# EAGLE board pcb (EAGLE 9.2.2)
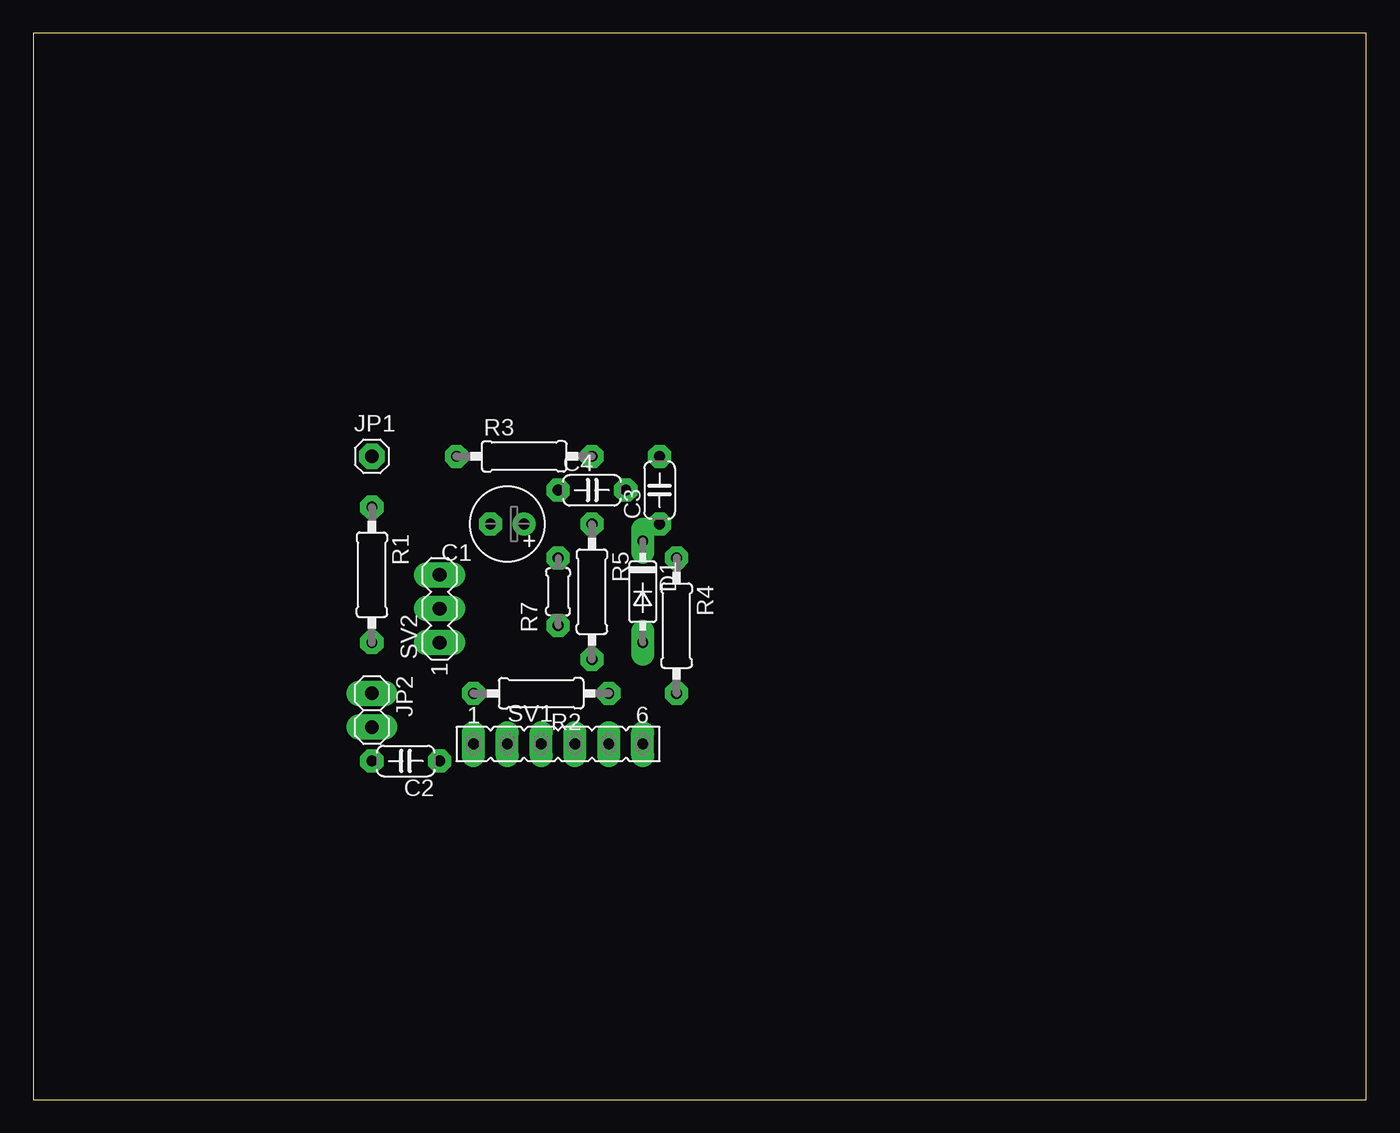
[diagram p0: board, top side]
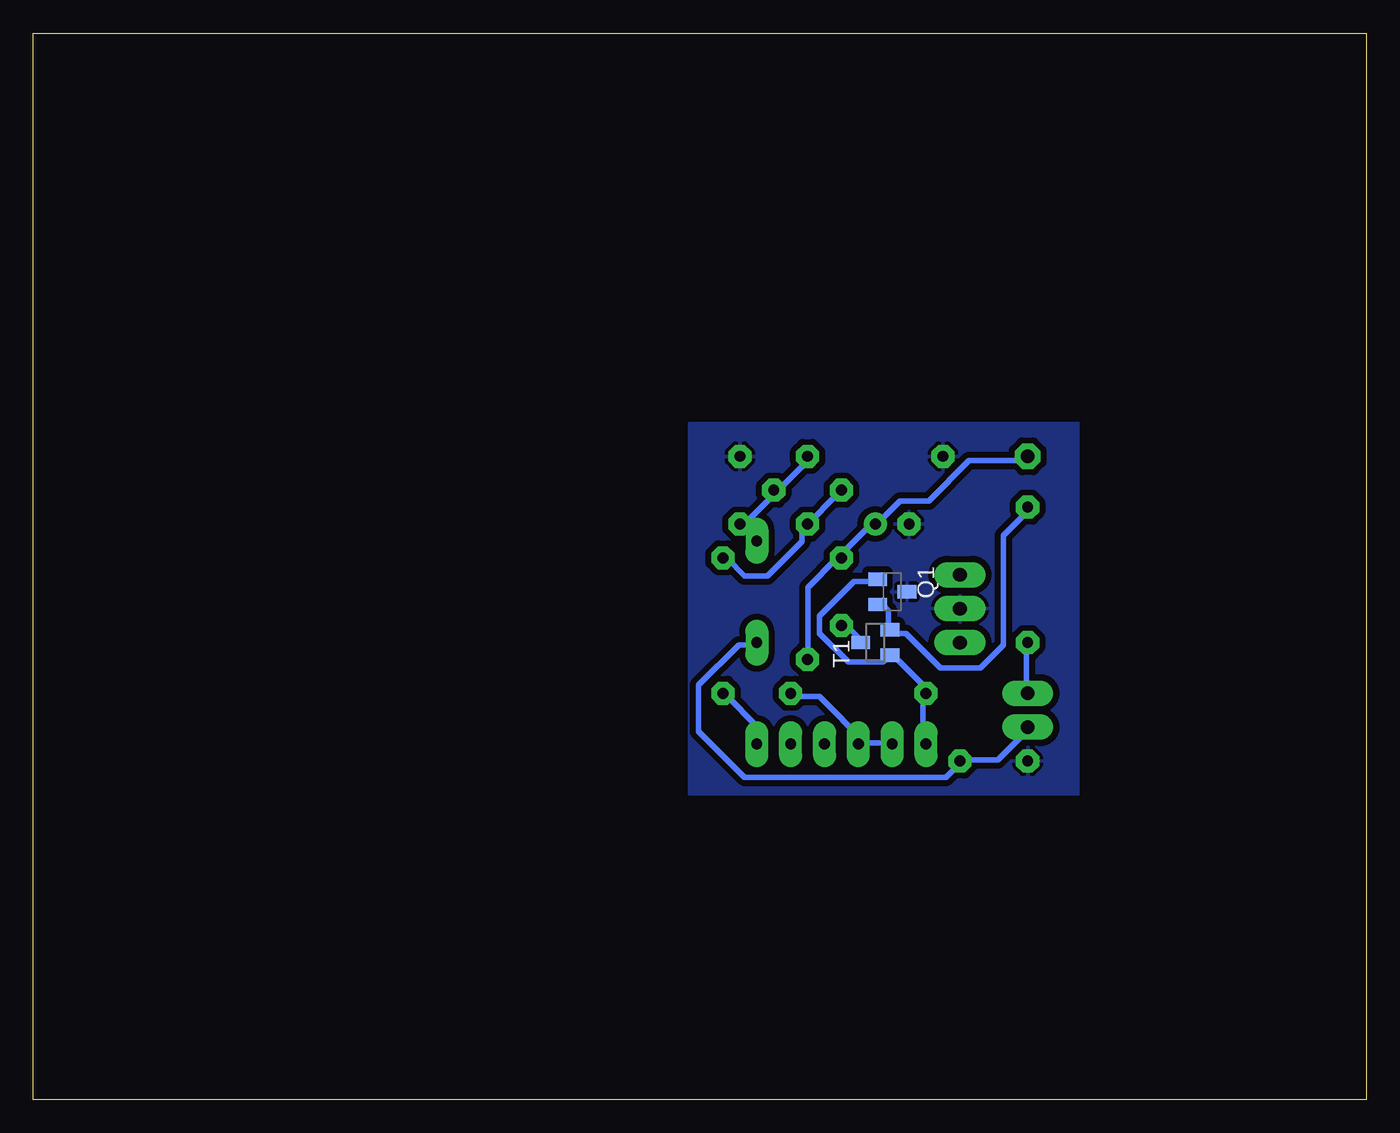
[diagram p1: board, bottom side, seen from below]

Size 100 x 80 mm. Coordinates in mm from the lower left corner, seen from the top.
Outline: 0,0 100,0 100,80 0,80 0,0
Copper layers (1*16): Top 0.035mm / dielectric 1.5mm / Bottom 0.035mm
Design rules "default *": minimum track width 16mil, minimum drill 0.35mm, track to track 18mil, track to pad 18mil, pad to pad 6mil, via to via 6mil, smd to smd 6mil, copper to edge 40mil, drill to drill 6mil, minimum pad ring 18mil, minimum via ring 8mil, stop-mask expansion 4mil, vias tented up to drill 0mil, thermal gap 10mil

## Footprints (pad centres in the part's own frame; a part is rotated, then mirrored left to right if it is on the bottom)
E2,5-6 = drill 0.813 pad 1.6: + -1.27,0 | drill 0.813 pad 1.6 octagon: - 1.27,0
C050-024X044 = drill 0.813 octagon: 1 -2.54,0; 2 2.54,0
DO35-7 = drill 0.813 long: A 3.81,0; C -3.81,0
1X01 = drill 1.016 octagon: 1 0,0
1X02 = drill 1.016 long: 1 -1.27,0; 2 1.27,0
SOT23-BEC = smd 1 x 1.4: B -0.95,-1.1; C 0,1.1; E 0.95,-1.1
0207/10 = drill 0.813 octagon: 1 -5.08,0; 2 5.08,0
0204/5 = drill 0.813 octagon: 1 -2.54,0; 2 2.54,0
FE06 = drill 0.813 long: 1 -6.35,0; 2 -3.81,0; 3 -1.27,0; 4 1.27,0; 5 3.81,0; 6 6.35,0
MA03-1 = drill 1.016 long: 1 -2.54,0; 2 0,0; 3 2.54,0
SOT23 = smd 1 x 1.4: 1 -0.95,-1.1; 2 0.95,-1.1; 3 0,1.1

## Placement (x,y rotation side)
C1  10uF  [E2,5-6]  35.56,43.18 180 top
C2  1n  [C050-024X044]  27.94,25.4 180 top
C3  1n  [C050-024X044]  46.99,45.72 90 top
C4  1n  [C050-024X044]  41.91,45.72 0 top
D1  1N4148DO35-7  [DO35-7]  45.72,38.1 270 top
JP1  [1X01]  25.4,48.26 0 top
JP2  [1X02]  25.4,29.21 270 top
Q1  BC857ALT1SMD  [SOT23-BEC]  35.56,38.1 270 bottom
R1  100  [0207/10]  25.4,39.37 270 top
R2  1k  [0207/10]  38.1,30.48 180 top
R3  220k  [0207/10]  36.83,48.26 0 top
R4  1k  [0207/10]  48.26,35.56 270 top
R5  1M  [0207/10]  41.91,38.1 270 top
R7  0  [0204/5]  39.37,38.1 90 top
SV1  [FE06]  39.37,26.67 0 top
SV2  [MA03-1]  30.48,36.83 90 top
T1  BC847  [SOT23]  36.83,34.29 90 bottom

## Library data of the parts
C1-C4 R1-R5 R7 = rcl
D1 = diode
JP1 JP2 = pinhead
Q1 = transistor-pnp
SV1 = con-lsta
SV2 = con-lstb
T1 = transistor-neu-to92

## Nets
+5V: C1.+ JP1.1 R5.2 R7.2
GND: C1.- C2.2 C3.2 Q1.C R3.1 SV2.2
N$1: Q1.E R1.1 T1.2
N$2: Q1.B R2.2 SV1.1 T1.1
N$4: JP2.1 R1.2
N$5: C2.1 D1.A JP2.2
N$6: C3.1 C4.2 D1.C R3.2
N$7: C4.1 R4.1 R5.1
N$8: R4.2 SV1.6
N$9: R7.1 T1.3
N$10: R2.1 SV1.2 SV1.3

## Tracks (layer width: path | path; a pad name or v marks a point on that pad's centre or on a via)
+5V
  Bottom 0.406: R5.2 41.88,33.25 41.88,38.43 39.73,40.59 R7.2 39.29,41.02 37.13,43.18 C1.+ 36.7,43.18 34.98,44.91 32.82,44.91 29.79,47.93 25.48,47.93 JP1.1
GND
  pour Bottom: 21.59,50.8 21.59,22.86 50.8,22.86 50.8,50.8
N$1
  Bottom 0.406: Q1.E 36.27,37.13 35.84,36.7 35.84,35.41 T1.2 35.41,34.98 34.54,34.98 31.95,32.38 28.93,32.38 27.2,34.11 27.2,42.32 25.48,44.04 R1.1
N$2
  Bottom 0.406: Q1.B 36.7,38.86 38.43,38.86 41.02,36.27 41.02,34.98 38.86,32.82 36.27,32.82 35.84,33.25 T1.1 35.41,33.25 32.82,30.66 R2.2 33.25,30.23 33.25,26.77 SV1.1
N$4
  Bottom 0.406: R1.2 25.48,34.11 25.48,30.66 JP2.1
N$5
  Bottom 0.406: JP2.2 25.48,27.64 27.64,25.48 30.23,25.48 C2.1 30.66,25.04 31.52,24.18 46.63,24.18 50.09,27.64 50.09,31.09 47.07,34.11 45.77,34.11 D1.A
N$6
  Bottom 0.406: 46.63,43.18 45.77,42.32 D1.C | R3.2 41.88,47.93 44.04,45.77 C4.2 44.48,45.34 46.63,43.18 | 46.63,43.18 C3.1
N$7
  Bottom 0.406: C4.1 39.73,45.34 41.88,43.18 R5.1 42.32,43.18 42.32,41.88 44.91,39.29 46.63,39.29 47.93,40.59 R4.1
N$8
  Bottom 0.406: SV1.6 45.77,26.77 45.77,28.07 47.93,30.23 R4.2
N$9
  Bottom 0.406: T1.3 38,34.54 39.29,35.84 R7.1
N$10
  Bottom 0.406: 37.57,26.77 38,26.77 SV1.3 37.57,26.77 | 37.57,26.77 35.84,26.77 SV1.2 | 37.57,26.77 41.02,30.23 43.18,30.23 R2.1